# Altium PCB Power_Merge_Board.PcbDoc
Units mil, origin at the board's own origin, x right, y up, seen from the top; angles counter-clockwise.
Board outline 6000 x 4000 mil, 2 copper layers (Top Layer, Bottom Layer); 12 components, 7 nets, 31 pads, 8 vias.
Unrouted connection lines stored in the file: 1.
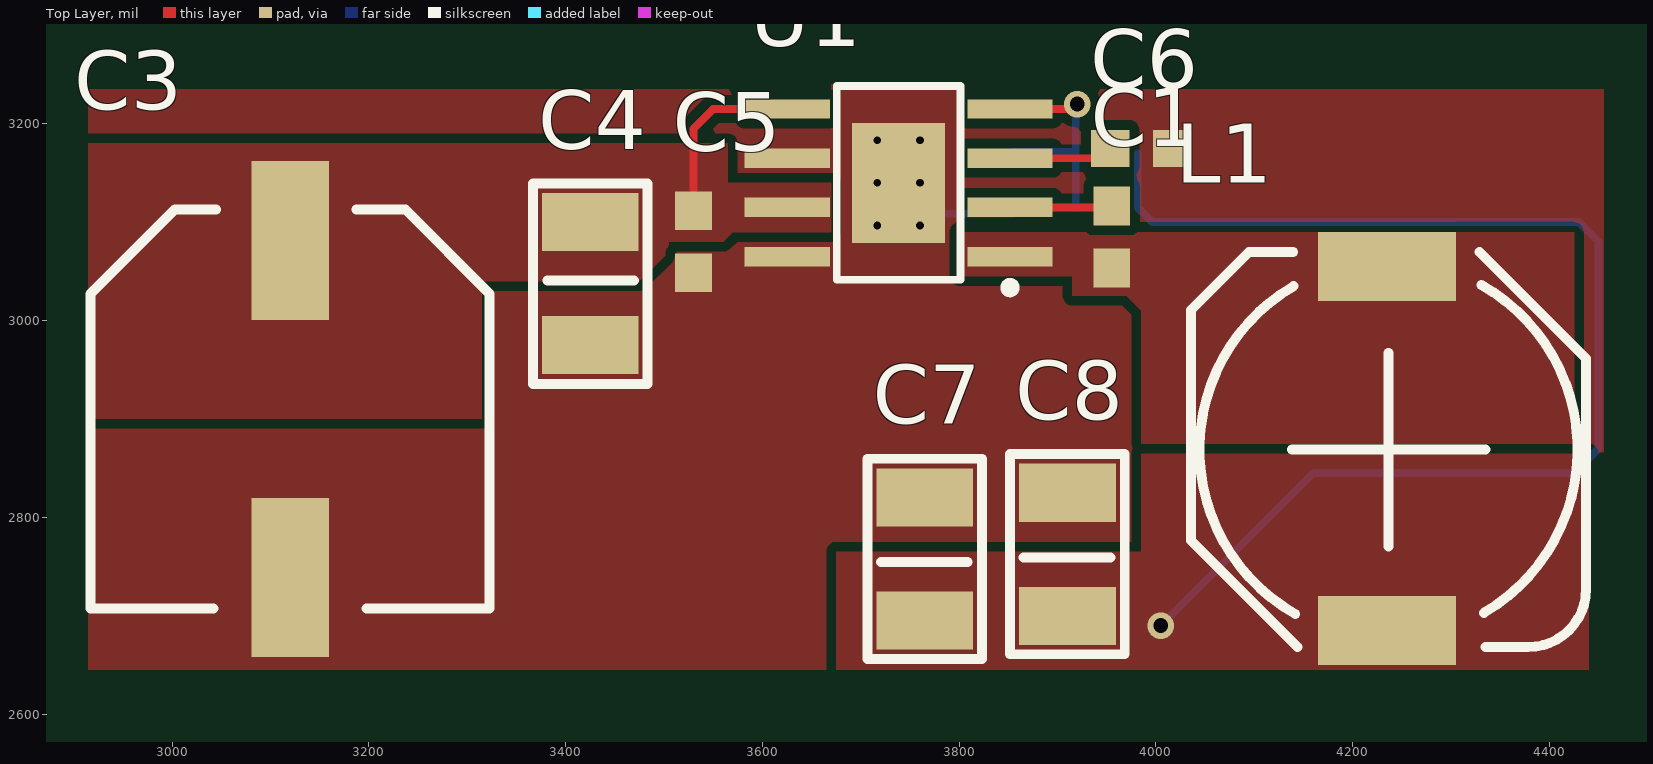
[diagram p0: Top Layer view]
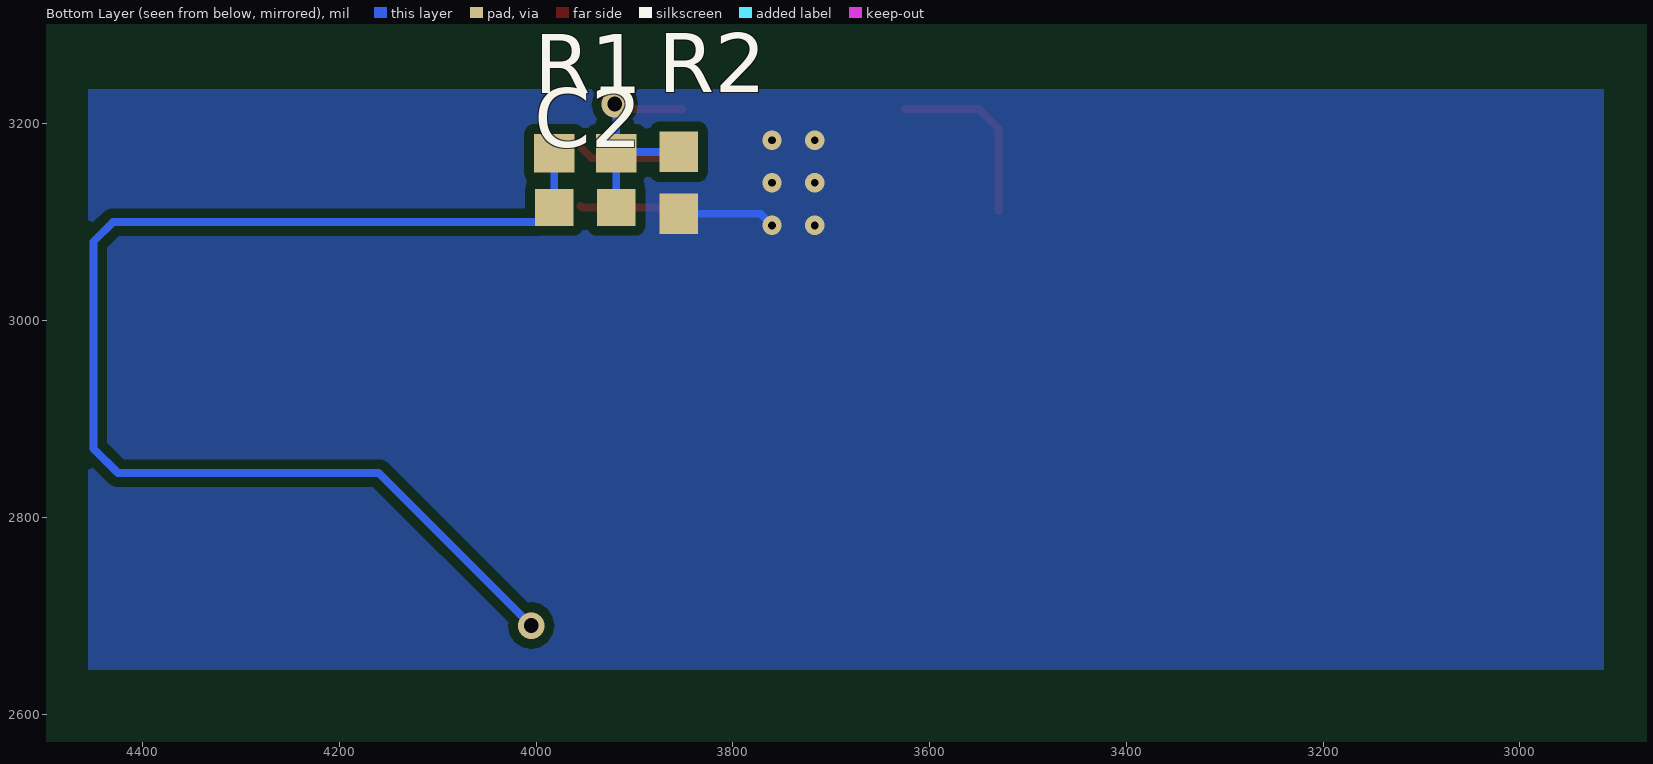
[diagram p1: Bottom Layer view, seen from below]

## Layer stack, top to bottom
Top Solder: solder mask 0.4, Solder Resist, Dk 3.5
Top Layer: signal copper 1.4
Dielectric 1: dielectric 12.6, FR-4, Dk 4.8
Bottom Layer: signal copper 1.4
Bottom Solder: solder mask 0.4, Solder Resist, Dk 3.5

## Board outline
1000,1000 7000,1000 7000,5000 1000,5000

## Design rules (kind name [scope] priority, off if disabled: settings)
Clearance [All] p1: gap=10 ignorepadtopadclearanceinfootprint=FALSE except(0: Arc-Hole Track-Hole SMDPad-Hole THPad-Hole Via-Hole Fill-Hole Poly-Hole Region-Hole Text-Hole; 5: Track-Track Track-SMDPad SMDPad-SMDPad; 7: Track-Via)
HoleSize [All] p1: absolutevalues=TRUE maxlimit=150 minlimit=10 maxpercent=80.000 minpercent=20.000
MinimumAnnularRing [All] p1: minimumring=7
MinimumSolderMaskSliver [All] p1: minsoldermaskwidth=1
PlaneConnect [All] p1: planeconnectstyle=Direct reliefexpansion=20 reliefentries=4 reliefconductorwidth=10 reliefairgap=10
PolygonConnect [All] p1: connectstyle=Direct reliefconductorwidth=10 reliefentries=4 polygonreliefangle="90 Angle" airgapwidth=10
RoutingVias [All] p1: holewidth=10 width=22 viastyle="Through Hole" minholewidth=10 minwidth=22 maxholewidth=100 maxwidth=150
SilkToSolderMaskClearance [IsPad] p1: minsilkscreentomaskgap=5 clearancetoexposedcopper=TRUE
SolderMaskExpansion [All] p1: expansion=4
Width [All] p1: maxlimit=150 minlimit=8 preferedwidth=10
26 further rules are at their usual default settings.

## Components (designator, comment, footprint, x,y, rotation, side; value= is the part's Value field where it differs from the comment)
C1 "Cap" CAPC0603 3955,3085 r270 top value=470nF
C2 "Cap" CAPC0603 3950,3115 r180 bottom value=75pF
C3 "EEHZA1H101P" EEHZA1H101P 3120,2910 r0 top value=100uF
C4 "Cap" CAP1210 3425,3100.98 r90 top value=10uF
C5 "Cap" CAPC0603 3530,3080 r270 top value=100nF
C6 "Cap" CAPC0603 3985,3175 r0 top value=10uF
C7 "Cap" CAP1210 3765,2694.21 r270 top value=47uF
C8 "Cap" CAP1210 3910,2699.02 r270 top value=47uF
L1 "MSS1048-563MLB" MSS1048-563MLB 4235,2870 r0 top value=56uH
R1 "Res" RES0603 3950,3170 r180 bottom value=40.2k
R2 "Res" RES0603 3855,3140 r270 bottom value=10k
U1 "LMR23610ADDAR" LMR23610ADDAR 3738.5,3140 r180 top

## Footprints (in the part's own frame and the unit in brackets; to place one, negate y for a bottom-side part, rotate by r counter-clockwise, add the part's x,y. Pads: shape width x height; smd on the part's side, far side on the other; paste and mask are expansions set on the pad)
CAP1210 [mm]
  rect 1.5x2.5 smd: 1(-0.02,0) 2(-3.2,0)
  silkscreen extent -4.2,-1.48 0.97,1.48, body extent -3.22,-1.25 0,1.26, height 2.5
CAPC0603 [mm] "Chip Capacitor, 2-Leads, Body 1.60x0.80mm, IPC Medium Density"
  rect 1x0.95 smd: 1(-0.8,0) 2(0.8,0)
  body extent -0.88,-0.48 0.87,0.48, height 0.8
EEHZA1H101P [mm] "CAP ALUM POLY HYB 100UF 50V SMD"
  rect 2x4.1 smd: 1(0,4.35) 2(0,-4.35)
  silkscreen extent -5.15,-5.15 5.15,5.15, body extent -5.24,-5.99 5.25,5.99, height 10.54
LMR23610ADDAR [mm] "IC REG BUCK ADJ 1A SYNC 8SOPWRPD"
  rect 2.2x0.5 smd: 1(-2.875,1.905) 2(-2.875,0.635) 3(-2.875,-0.635) 4(-2.875,-1.905) 5(2.875,-1.905) 6(2.875,-0.635) 7(2.875,0.635) 8(2.875,1.905)
  rect 2.4x3.1 smd: 9(0,0)
  silkscreen extent -3,-2.5 1.6,2.83, body extent -2,-2.5 2,2.5, height 1.7
MSS1048-563MLB [mm] "FIXED IND 56UH 1.7A 126 MOHM"
  rect 3.56x1.78 smd: 1(0,4.7) 2(0,-4.7)
  silkscreen extent -5.06,-5.13 5.14,5.07, body extent -5.1,-5.15 5.1,5.15, height 5
RES0603 [mm] "Chip Resistor, 2-Leads, Body 1.60x0.80mm, IPC Medium Density"
  rect 1.05x1 smd: 1(-0.8,0) 2(0.8,0)
  body extent -0.88,-0.48 0.87,0.47, height 0.8

## Part data
C1 C2 C4 C5 C6: Supplier Part Number 1=1276-1000-1-ND, Supplier 1=Digi-Key
C3: "CAP ALUM POLY HYB 100UF 50V SMD", Manufacturer 1=Panasonic, Supplier Part Number 1=P15442CT-ND, Tolerance=20%, Voltage=50V, ComponentLink1Description="Web Site", ComponentLink1URL=https://na.industrial.panasonic.com/products/capacitors/aluminum-electrolytic-capacitors/conductive-polymer-hybrid-aluminum-electrolytic/series/za-high-temp-reflow/ABA0135/model/EEHZA1H101P, ComponentLink2Description="Data Sheet", ComponentLink2URL=https://industrial.panasonic.com/cdbs/www-data/pdf/RDD0000/ABA0000C1221.pdf, ComponentLink3Description="ZA Series Technical Data", ComponentLink3URL=https://industrial.panasonic.com/cdbs/www-data/pdf/RDD0000/ABA0000COS44.pdf, Manufacturer Part Number 1=EEHZA1H101P, Supplier 1=Digi-Key
C7 C8: Supplier Part Number 1=490-6538-1-ND, Supplier 1=Digi-Key
L1: "FIXED IND 56UH 1.7A 126 MOHM", Manufacturer 1=Coilcraft, ComponentLink1Description="Web Site", ComponentLink1URL=https://www.coilcraft.com/mss1048.cfm, Manufacturer Part Number 1=MSS1048-563MLB, Supplier 1=Coilcraft, Supplier Part Number 1=MSS1048-563MLB
R1: Supplier Part Number 1=RMCF0603FT40K2CT-ND, Supplier 1=Digi-Key
R2: Supplier Part Number 1=RMCF0603JT10K0CT-ND, Supplier 1=Digi-Key
U1: "IC REG BUCK ADJ 1A SYNC 8SOPWRPD", Manufacturer 1="Texas Instruments", Supplier Part Number 1=296-47267-1-ND, ComponentLink1Description=Datasheet, ComponentLink1URL=http://www.ti.com/lit/ds/symlink/lmr23610.pdf, ComponentLink2Description="Web Site", ComponentLink2URL=http://www.ti.com/product/LMR23610/description, Manufacturer Part Number 1=LMR23610ADDAR, Supplier 1=Digi-Key

## Via types
v1: diameter 19.68, hole 7.87, Top Layer to Bottom Layer, 6 vias
v2: diameter 27, hole 15, Top Layer to Bottom Layer, 2 vias

## Nets (pads, with @x,y where several pads share a name; then routed paths per layer and width w, separated by ;. In a path a pad name is that pad's centre, name@x,y a point inside that pad or via, vN(x,y) a via of type N, cw(c..) or ccw(c..) an arc to the next point about the centre after c; other vN are vias at no path point)
GND: C3.2 C4.2 C5.2 C6.2 C7.2 C8.2 R2.2 U1.6 U1.8 U1.9 | length 99.7
  Bottom Layer w8: v1(3760.16,3096.69) 3771.97,3108.5 R2.2
  other v1: 3716.85,3096.69 3716.85,3140 3760.16,3140 3716.85,3183.31 3760.16,3183.31
NetC1_1: C1.1 U1.2 | length 103.9
  Top Layer w8: U1.2 3953.5,3115 C1.1
NetC1_2: C1.2 L1.1 U1.1
NetC2_2: C2.2 R1.2 R2.1 U1.4 | length 240.1
  Top Layer w8: U1.4 3915,3215 v2(3920,3220)
  Bottom Layer w8: R2.1 3917.01,3171.5 R1.2 ; C2.2 R1.2 ; v2(3920,3220) 3918.5,3218.5 R1.2
NetC6_1: C6.1 U1.3 | length 106
  Top Layer w8: U1.3 3943.5,3165 C6.1
Vin: C3.1 C4.1 C5.1 U1.5 U1.7 | length 187.1
  Top Layer w8: C5.1 3530,3195 3550,3215 U1.5
Vout: C2.1 C7.1 C8.1 L1.2 R1.1 | length 1267.6
  Bottom Layer w8: R1.1 C2.1 3996.5,3100 4430,3100 4450,3080 4450,2870 4425,2845 4160,2845 v2(4005,2690)

## Polygon pours and split planes (outlines as drawn)
GND on Top Layer "GND_L01_P010" (solid, pour order 10): 2915,2645 4455,2645 4455,3235 2915,3235
GND on Top Layer "GND_L01_P006" (solid, pour order 6): 3985,2765 3675,2765 3675,2645 2915,2645 2915,2900 3315,2900 3315,3030 3480,3030 3480,3080 3670,3080 3670,3140 3565,3140 3565,3180 3670,3180 3670,3240 3805,3240 3800,3235 3800,3045 3915,3045 3915,3025 3985,3025
Vout on Top Layer "VOUT_L01_P004" (solid, pour order 4): 4440,2875 4440,2645 3675,2645 3675,2765 3985,2765 3985,2875
NetC1_2 on Top Layer "NETC1_2_L01_P002" (solid, pour order 2): 3800,3090 3800,3045 3915,3045 3915,3025 3970,3025 3985,3010 3985,2875 4425,2875 4425,3090
Vin on Top Layer "VIN_L01_P000" (solid, pour order 0): 3670,3140 3670,3090 3570,3090 3560,3080 3505,3080 3505,3070 3475,3040 3315,3040 3315,2900 2915,2900 2915,3180 3565,3180 3565,3140
GND on Bottom Layer "GND_L02_P008" (solid, pour order 8): 2915,2645 4455,2645 4455,3235 2915,3235